# Altium PCB AddOnCard.PcbDoc
Units mm, origin at the board's own origin, x right, y up, seen from the top; angles counter-clockwise.
Board outline 127 x 124.46 mm, 2 copper layers (Top Layer, Bottom Layer); 8 components, 47 nets, 220 pads, 9 vias.
Unrouted connection lines stored in the file: 40.
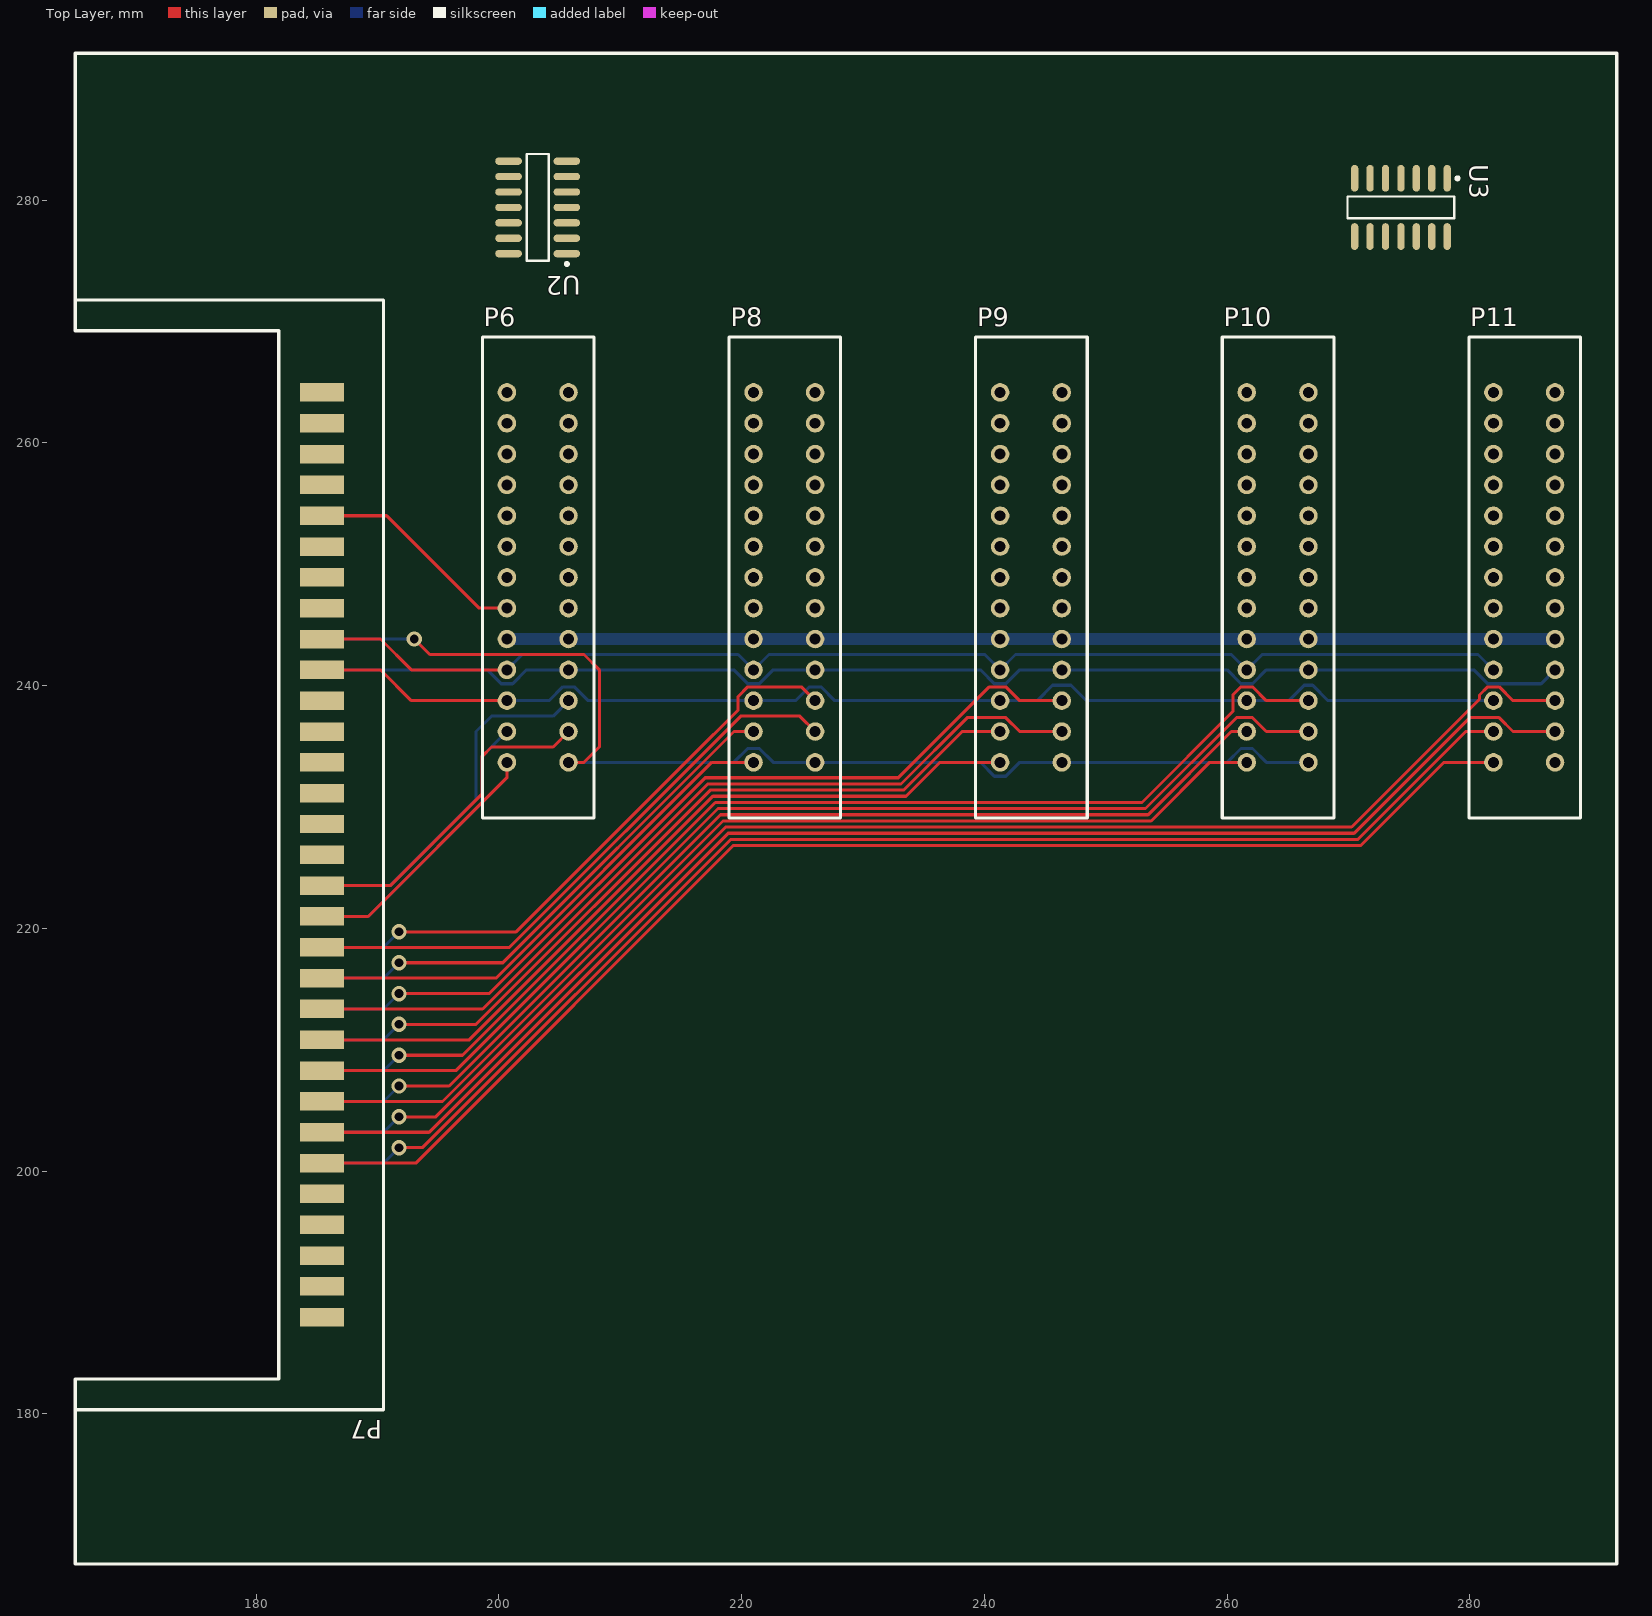
[diagram p0: Top Layer view]
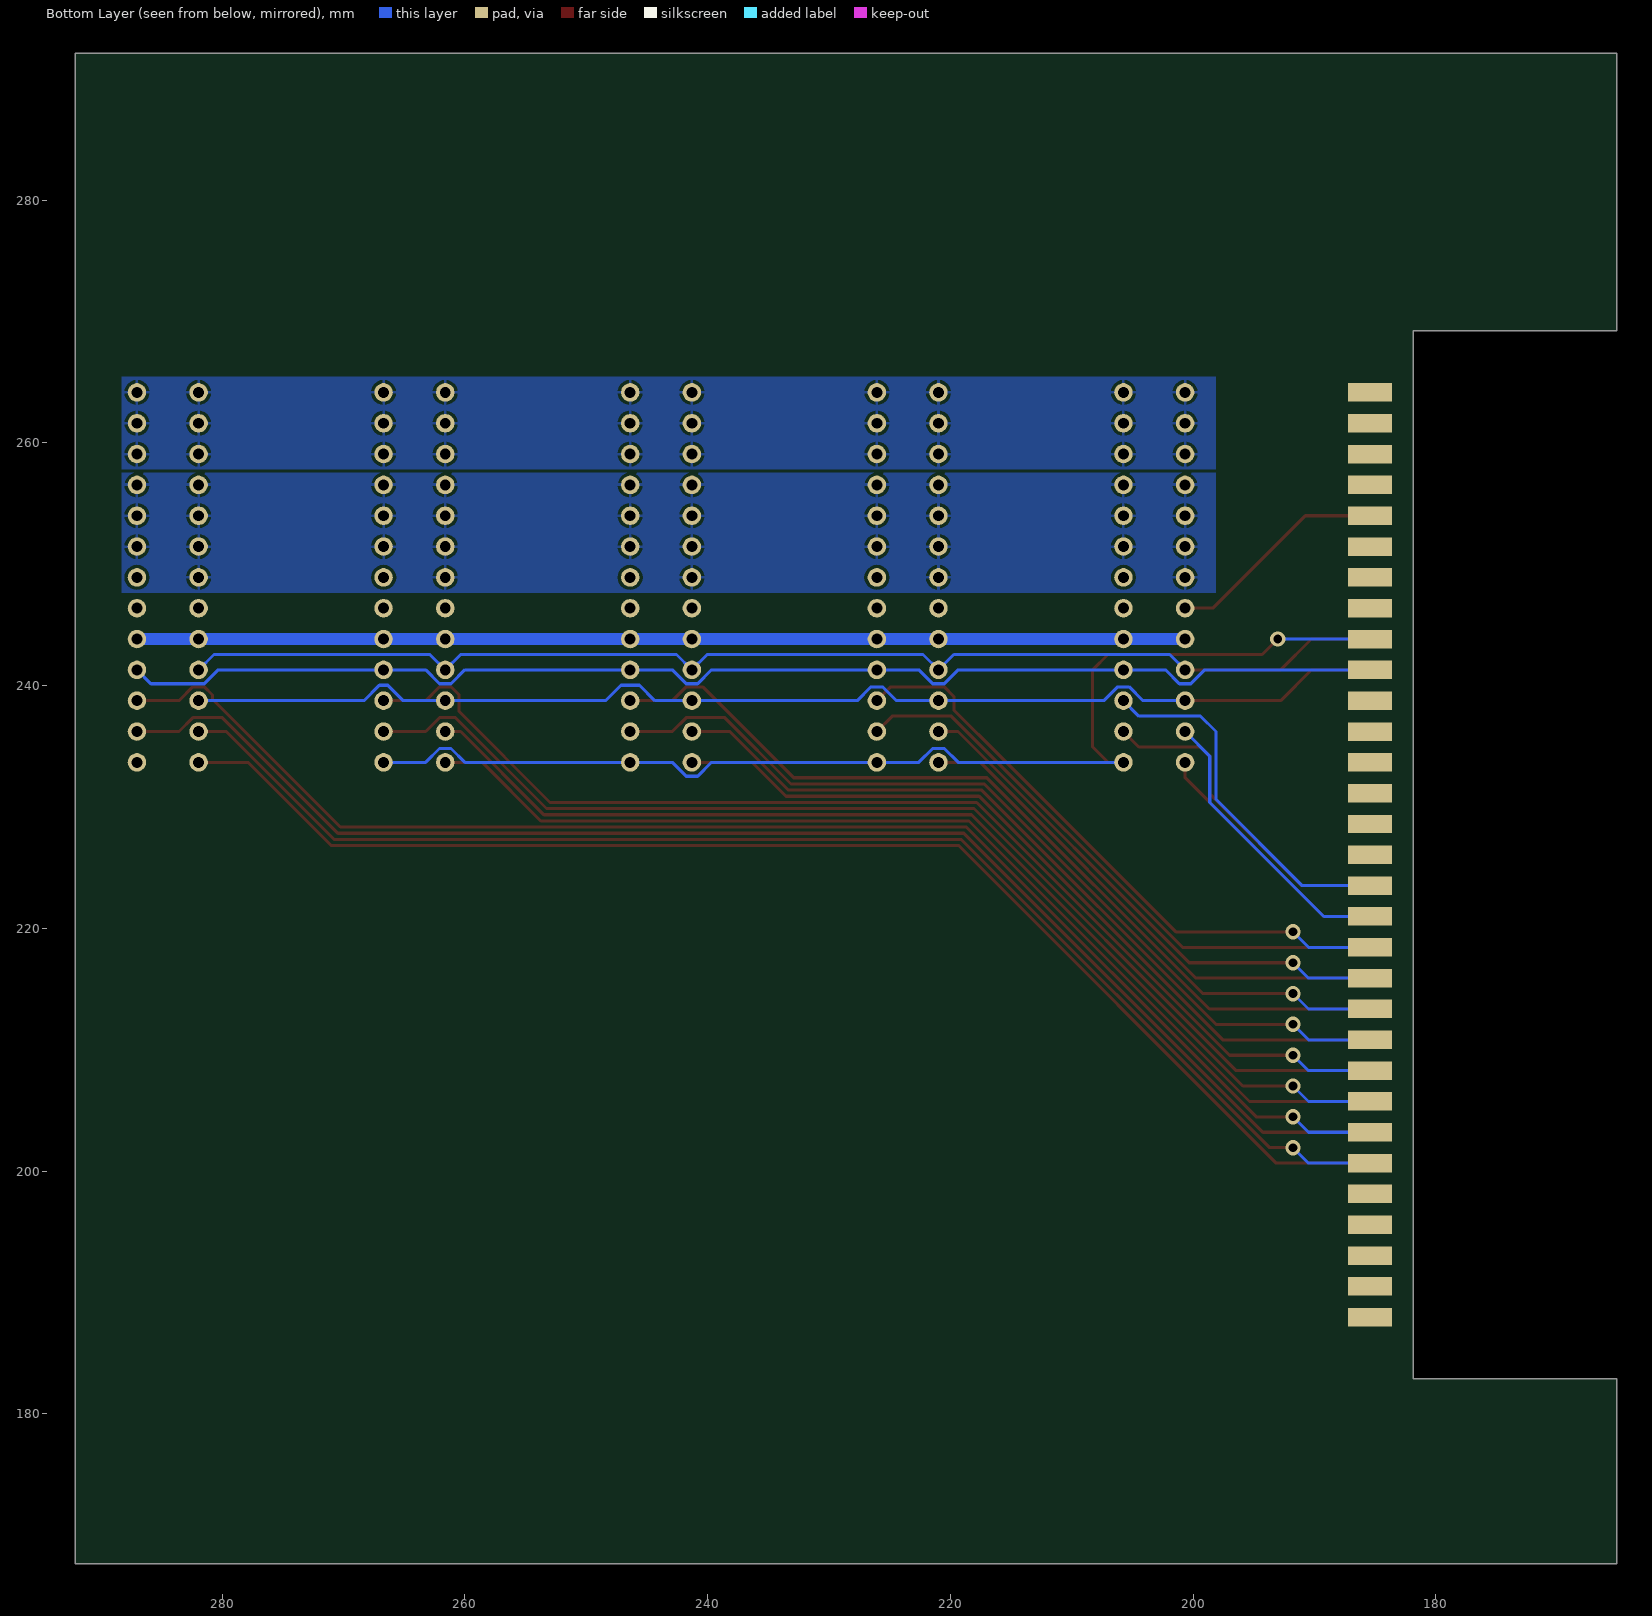
[diagram p1: Bottom Layer view, seen from below]

## Layer stack, top to bottom
Top Layer: signal copper 0.0356
Dielectric: dielectric 0.32, FR-4, Dk 4.8
Bottom Layer: signal copper 0.0356

## Board outline
165.1,269.24 165.1,292.1 292.1,292.1 292.1,167.64 165.1,167.64 165.1,182.88 181.864,182.88 181.864,269.24

## Design rules (kind name [scope] priority, off if disabled: settings)
Clearance [All] p1: gap=0.254
PolygonConnect [All] p1: connectstyle=Relief reliefconductorwidth=0.254 reliefentries=4 polygonreliefangle="90 Angle"
RoomDefinition AddOnCard [InComponentClass('AddOnCard')] p1: confinementstyle=ConfineOut formatcopy=TRUE lockcomponents=FALSE outline 178.943,24.511 258.572,24.511 258.572,118.999 178.943,118.999
RoutingVias [All] p1: holewidth=0.711 width=1.27 viastyle="Through Hole" minholewidth=0.711 minwidth=1.27 maxholewidth=0.711 maxwidth=1.27
SMDNeckDown [All] p1: percent=200.000
SilkscreenOverComponentPads [All] p1: minsilkscreentomaskgap=0.254
SolderMaskExpansion [All] p1: expansion=0.102
Width [All] p1: maxlimit=2 minlimit=0.254 preferedwidth=0.254
27 further rules are at their usual default settings.

## Components (designator, comment, footprint, x,y, rotation, side; value= is the part's Value field where it differs from the comment)
P6 "13x2A Slot" SL-26A 205.74,233.68 r90 top
P7 "31x2BR Slot" SL-62BR 165.1,266.7 r270 top
P8 "13x2A Slot" SL-26A 226.06,233.68 r90 top
P9 "13x2A Slot" SL-26A 246.38,233.68 r90 top
P10 "13x2A Slot" SL-26A 266.7,233.68 r90 top
P11 "13x2A Slot" SL-26A 287.02,233.68 r90 top
U2 "SN74ALS86D" D014_N 203.2,279.4 r180 top
U3 "SN74ALS86D" D014_N 274.32,279.4 r270 top

## Footprints (in the part's own frame and the unit in brackets; to place one, negate y for a bottom-side part, rotate by r counter-clockwise, add the part's x,y. Pads: shape width x height; smd on the part's side, far side on the other; paste and mask are expansions set on the pad)
D014_N [mm] "SOIC, 14-Leads, Body 8.7x3.9mm, Pitch 1.27mm, IPC Medium Density"
  oval 2.2x0.6 smd: 1(-2.4,3.81) 2(-2.4,2.54) 3(-2.4,1.27) 4(-2.4,0) 5(-2.4,-1.27) 6(-2.4,-2.54) 7(-2.4,-3.81) 8(2.4,-3.81) 9(2.4,-2.54) 10(2.4,-1.27) 11(2.4,0) 12(2.4,1.27) 13(2.4,2.54) 14(2.4,3.81)
  silkscreen extent -2.53,-4.4 0.9,4.78, body extent -1.95,-4.33 1.95,4.33, height 1.75
SL-26A [mil] "Mother Slot"
  round 60 hole 35.43: 1(0,0) 2(100,0) 3(200,0) 4(300,0) 5(400,0) 6(500,0) 7(600,0) 8(700,0) 9(800,0) 10(900,0) 11(1000,0) 12(1100,0) 13(1200,0) 14(0,200) 15(100,200) 16(200,200) 17(300,200) 18(400,200) 19(500,200) 20(600,200) 21(700,200) 22(800,200) 23(900,200) 24(1000,200) 25(1100,200) 26(1200,200)
  silkscreen extent -181,-83 1380,280, body extent -181,-83 1378,280, height 634
SL-62BR [mm]
  rect 1.524x3.6 smd: 1(2.54,20.32) 2(5.08,20.32) 3(7.62,20.32) 4(10.16,20.32) 5(12.7,20.32) 6(15.24,20.32) 7(17.78,20.32) 8(20.32,20.32) 9(22.86,20.32) 10(25.4,20.32) 11(27.94,20.32) 12(30.48,20.32) 13(33.02,20.32) 14(35.56,20.32) 15(38.1,20.32) 16(40.64,20.32) 17(43.18,20.32) 18(45.72,20.32) 19(48.26,20.32) 20(50.8,20.32) 21(53.34,20.32) 22(55.88,20.32) 23(58.42,20.32) 24(60.96,20.32) 25(63.5,20.32) 26(66.04,20.32) 27(68.58,20.32) 28(71.12,20.32) 29(73.66,20.32) 30(76.2,20.32) 31(78.74,20.32)
  rect 1.524x3.6 smd far side: 32(2.54,20.32) 33(5.08,20.32) 34(7.62,20.32) 35(10.16,20.32) 36(12.7,20.32) 37(15.24,20.32) 38(17.78,20.32) 39(20.32,20.32) 40(22.86,20.32) 41(25.4,20.32) 42(27.94,20.32) 43(30.48,20.32) 44(33.02,20.32) 45(35.56,20.32) 46(38.1,20.32) 47(40.64,20.32) 48(43.18,20.32) 49(45.72,20.32) 50(48.26,20.32) 51(50.8,20.32) 52(53.34,20.32) 53(55.88,20.32) 54(58.42,20.32) 55(60.96,20.32) 56(63.5,20.32) 57(66.04,20.32) 58(68.58,20.32) 59(71.12,20.32) 60(73.66,20.32) 61(76.2,20.32) 62(78.74,20.32)
  silkscreen extent -5.08,0 86.36,25.4, body extent -2.4,0 83.5,16.5, height 4.6

## Part data
P7: "31x2 Slot"
U2 U3: "Quadruple 2-Input Exclusive-OR Gate"

## Via types
v1: diameter 1.27, hole 0.711, Top Layer to Bottom Layer, 9 vias

## Nets (pads, with @x,y where several pads share a name; then routed paths per layer and width w, separated by ;. In a path a pad name is that pad's centre, name@x,y a point inside that pad or via, vN(x,y) a via of type N, cw(c..) or ccw(c..) an arc to the next point about the centre after c; other vN are vias at no path point)
+30: P6.11 P6.12 P6.13 P6.24 P6.25 P6.26 P7.30 P7.31 P7.61 P7.62 P8.11 P8.12 P8.13 P8.24 P8.25 P8.26 P9.11 P9.12 P9.13 P9.24 P9.25 P9.26 P10.11 P10.12 P10.13 P10.24 P10.25 P10.26 P11.11 P11.12 P11.13 P11.24 P11.25 P11.26
DRV_DIR_D: P6.15 P7.49 | length 23.8
  Bottom Layer w0.254: P7.49 189.23,220.98 198.628,230.378 198.628,234.188 P6.15
DRV_DIR_E: P7.51 P8.15 | length 44
  Top Layer w0.254: v1(191.77,217.17) 200.319,217.17 219.369,236.22 P8.15
  Bottom Layer w0.254: P7.51 190.5,215.9 v1(191.77,217.17)
DRV_DIR_F: P7.53 P9.15 | length 66.4
  Top Layer w0.254: v1(191.77,212.09) 198.113,212.09 217.417,231.394 233.339,231.394 238.165,236.22 P9.15
  Bottom Layer w0.254: P7.53 190.5,210.82 v1(191.77,212.09)
DRV_DIR_G: P7.55 P10.15 | length 88.8
  Top Layer w0.254: v1(191.77,207.01) 195.906,207.01 218.258,229.362 253.492,229.362 260.35,236.22 P10.15
  Bottom Layer w0.254: P7.55 190.5,205.74 v1(191.77,207.01)
DRV_DIR_H: P7.57 P11.15 | length 111.2
  Top Layer w0.254: v1(191.77,201.93) 193.7,201.93 219.1,227.33 270.764,227.33 279.654,236.22 P11.15
  Bottom Layer w0.254: P7.57 190.5,200.66 v1(191.77,201.93)
DRV_ENA_D: P6.3 P7.48 | length 29.9
  Bottom Layer w0.254: P7.48 191.008,223.52 198.12,230.632 198.12,236.22 199.39,237.49 204.47,237.49 P6.3
DRV_ENA_E: P7.50 P8.3 | length 50.7
  Top Layer w0.254: v1(191.77,219.71) 201.422,219.71 215.808,234.096 219.71,237.998 219.71,239.106 220.507,239.903 224.917,239.903 P8.3
  Bottom Layer w0.254: P7.50 190.5,218.44 v1(191.77,219.71)
DRV_ENA_F: P7.52 P9.3 | length 72.4
  Top Layer w0.254: v1(191.77,214.63) 199.216,214.63 216.996,232.41 232.918,232.41 240.411,239.903 241.773,239.903 242.916,238.76 P9.3
  Bottom Layer w0.254: P7.52 190.5,213.36 v1(191.77,214.63)
DRV_ENA_G: P7.54 P10.3 | length 95.7
  Top Layer w0.254: v1(191.77,209.55) 197.009,209.55 217.837,230.378 252.984,230.378 260.477,237.871 260.477,239.233 261.147,239.903 262.093,239.903 263.236,238.76 P10.3
  Bottom Layer w0.254: P7.54 190.5,208.28 v1(191.77,209.55)
DRV_ENA_H: P7.56 P11.3 | length 117.5
  Top Layer w0.254: v1(191.77,204.47) 194.803,204.47 218.679,228.346 270.256,228.346 280.797,238.887 280.797,239.233 281.467,239.903 282.413,239.903 283.556,238.76 P11.3
  Bottom Layer w0.254: P7.56 190.5,203.2 v1(191.77,204.47)
DRV_HOME_D: P6.14 P7.18 | length 21.2
  Top Layer w0.254: P7.18 189.23,220.98 200.66,232.41 P6.14
DRV_HOME_E: P7.20 P8.14 | length 42.9
  Top Layer w0.254: P7.20 199.767,215.9 217.547,233.68 P8.14
DRV_HOME_F: P7.22 P9.14 | length 65.3
  Top Layer w0.254: P7.22 197.561,210.82 217.627,230.886 233.549,230.886 236.343,233.68 P9.14
DRV_HOME_G: P7.24 P10.14 | length 87.8
  Top Layer w0.254: P7.24 195.355,205.74 218.469,228.854 253.746,228.854 258.572,233.68 P10.14
DRV_HOME_H: P7.26 P11.14 | length 110.2
  Top Layer w0.254: P7.26 193.148,200.66 219.31,226.822 271.018,226.822 277.876,233.68 P11.14
DRV_MS1: P6.17 P7.9 P8.17 P9.17 P10.17 P11.17 | length 101.8
  Top Layer w0.254: P7.9 190.246,243.84 192.786,241.3 P6.17
  Bottom Layer w0.254: P6.17 201.93,242.57 219.71,242.57 P8.17 222.25,242.57 240.03,242.57 P9.17 242.57,242.57 260.35,242.57 P10.17 262.89,242.57 280.67,242.57 P11.17
DRV_MS2: P6.16 P7.10 P8.16 P9.16 P10.16 P11.16 | length 101.6
  Top Layer w0.254: P7.10 190.246,241.3 192.786,238.76 P6.16
  Bottom Layer w0.254: P6.16 204.124,238.76 205.267,239.903 206.213,239.903 207.356,238.76 P8.16 224.444,238.76 225.587,239.903 226.533,239.903 227.676,238.76 P9.16 244.348,238.76 245.618,240.03 247.142,240.03 248.412,238.76 P10.16 265.084,238.76 266.354,240.03 267.046,240.03 268.316,238.76 P11.16
DRV_RESET: P6.1 P7.40 P8.1 P9.1 P10.1 P11.1 | length 97.4
  Top Layer w0.254: v1(193.04,243.84) 194.31,242.57 207.01,242.57 208.28,241.3 208.28,234.95 207.01,233.68 P6.1@205.486,233.68
  Bottom Layer w0.254: P7.40 v1(193.04,243.84) ; P6.1 219.364,233.68 220.507,234.823 221.453,234.823 222.596,233.68 P8.1 239.684,233.68 240.827,232.537 241.773,232.537 242.916,233.68 P9.1 260.004,233.68 261.147,234.823 262.093,234.823 263.236,233.68 P10.1
DRV_SLEEP: P6.4 P7.41 P8.4 P9.4 P10.4 P11.4 | length 106.3
  Bottom Layer w0.254: P7.41 199.044,241.3 200.187,240.157 201.133,240.157 202.276,241.3 P6.4 219.364,241.3 220.507,240.157 221.453,240.157 222.596,241.3 P8.4 239.684,241.3 240.827,240.157 241.773,240.157 242.916,241.3 P9.4 260.004,241.3 261.147,240.157 262.093,240.157 263.236,241.3 P10.4 280.324,241.3 281.467,240.157 285.877,240.157 P11.4
DRV_STEP_D: P6.2 P7.17 | length 27.4
  Top Layer w0.254: P7.17 191.052,223.52 198.628,231.096 198.628,234.188 199.39,234.95 204.47,234.95 P6.2
DRV_STEP_E: P7.19 P8.2 | length 49.1
  Top Layer w0.254: P7.19 200.87,218.44 219.92,237.49 224.79,237.49 P8.2
DRV_STEP_F: P7.21 P9.2 | length 71.4
  Top Layer w0.254: P7.21 198.664,213.36 217.206,231.902 233.128,231.902 238.589,237.363 241.773,237.363 242.916,236.22 P9.2
DRV_STEP_G: P7.23 P10.2 | length 93.8
  Top Layer w0.254: P7.23 196.458,208.28 218.048,229.87 253.282,229.87 260.775,237.363 262.093,237.363 263.236,236.22 P10.2
DRV_STEP_H: P7.25 P11.2 | length 116.2
  Top Layer w0.254: P7.25 194.251,203.2 218.889,227.838 270.466,227.838 279.991,237.363 282.413,237.363 283.556,236.22 P11.2
GND: P6.8 P6.9 P6.10 P6.20 P6.21 P6.22 P6.23 P7.28 P7.29 P7.59 P7.60 P8.8 P8.9 P8.10 P8.20 P8.21 P8.22 P8.23 P9.8 P9.9 P9.10 P9.20 P9.21 P9.22 P9.23 P10.8 P10.9 P10.10 P10.20 P10.21 P10.22 P10.23 P11.8 P11.9 P11.10 P11.20 P11.21 P11.22 P11.23 U2.7 U3.4 U3.5 U3.7 U3.9 U3.10 U3.12 U3.13
NULL_D: P6.19 P7.5 | length 18.4
  Top Layer w0.254: P7.5 190.754,254 198.374,246.38 P6.19
NULL_E: P7.4 P8.19
NULL_F: P7.3 P9.19
NULL_G: P7.2 P10.19
NULL_H: P7.1 P11.19
POS_D: P7.35 U2.3
POS_D_1: P6.7 U2.2
POS_D_2: P6.6 U2.1
POS_E: P7.36 U2.6
POS_E_1: P8.7 U2.5
POS_E_2: P8.6 U2.4
POS_F: P7.37 U2.8
POS_F_1: P9.7 U2.10
POS_F_2: P9.6 U2.9
POS_G: P7.38 U2.11
POS_G_1: P10.7 U2.13
POS_G_2: P10.6 U2.12
POS_H: P7.39 U3.3
POS_H_1: P11.7 U3.2
POS_H_2: P11.6 U3.1
VCC: P6.5 P6.18 P7.27 P7.58 P8.5 P8.18 P9.5 P9.18 P10.5 P10.18 P11.5 P11.18 U2.14 U3.14 | length 86.4
  Bottom Layer w1: P6.18 P6.5 P8.18 P8.5 P9.18 P9.5 P10.18 P10.5 P11.18 P11.5
pads on no net: P7.6 P7.7 P7.8 P7.11 P7.12 P7.13 P7.14 P7.15 P7.16 P7.32 P7.33 P7.34 P7.42 P7.43 P7.44 P7.45 P7.46 P7.47 U3.6 U3.8 U3.11

## Polygon pours and split planes (outlines as drawn)
+30 on Bottom Layer "Top Layer-No Net" (solid, remove dead copper, pour order 1000): 198.12,265.43 198.12,257.81 288.29,257.81 288.29,265.43
GND on Bottom Layer "Top Layer-No Net" (solid, remove dead copper, pour order 1001): 288.29,257.81 288.29,247.65 198.12,247.65 198.12,257.81

## Silkscreen, mask and mechanical layers (free items; w line width, h text height)
Top Overlay:
  lines w0.254: 165.1,167.64 165.1,182.88 181.864,182.88 181.864,269.24 165.1,269.24 165.1,271.78 165.1,292.1 292.1,292.1 292.1,167.64 165.1,167.64